# EAGLE board interactiveBoard (EAGLE 9.6.2)
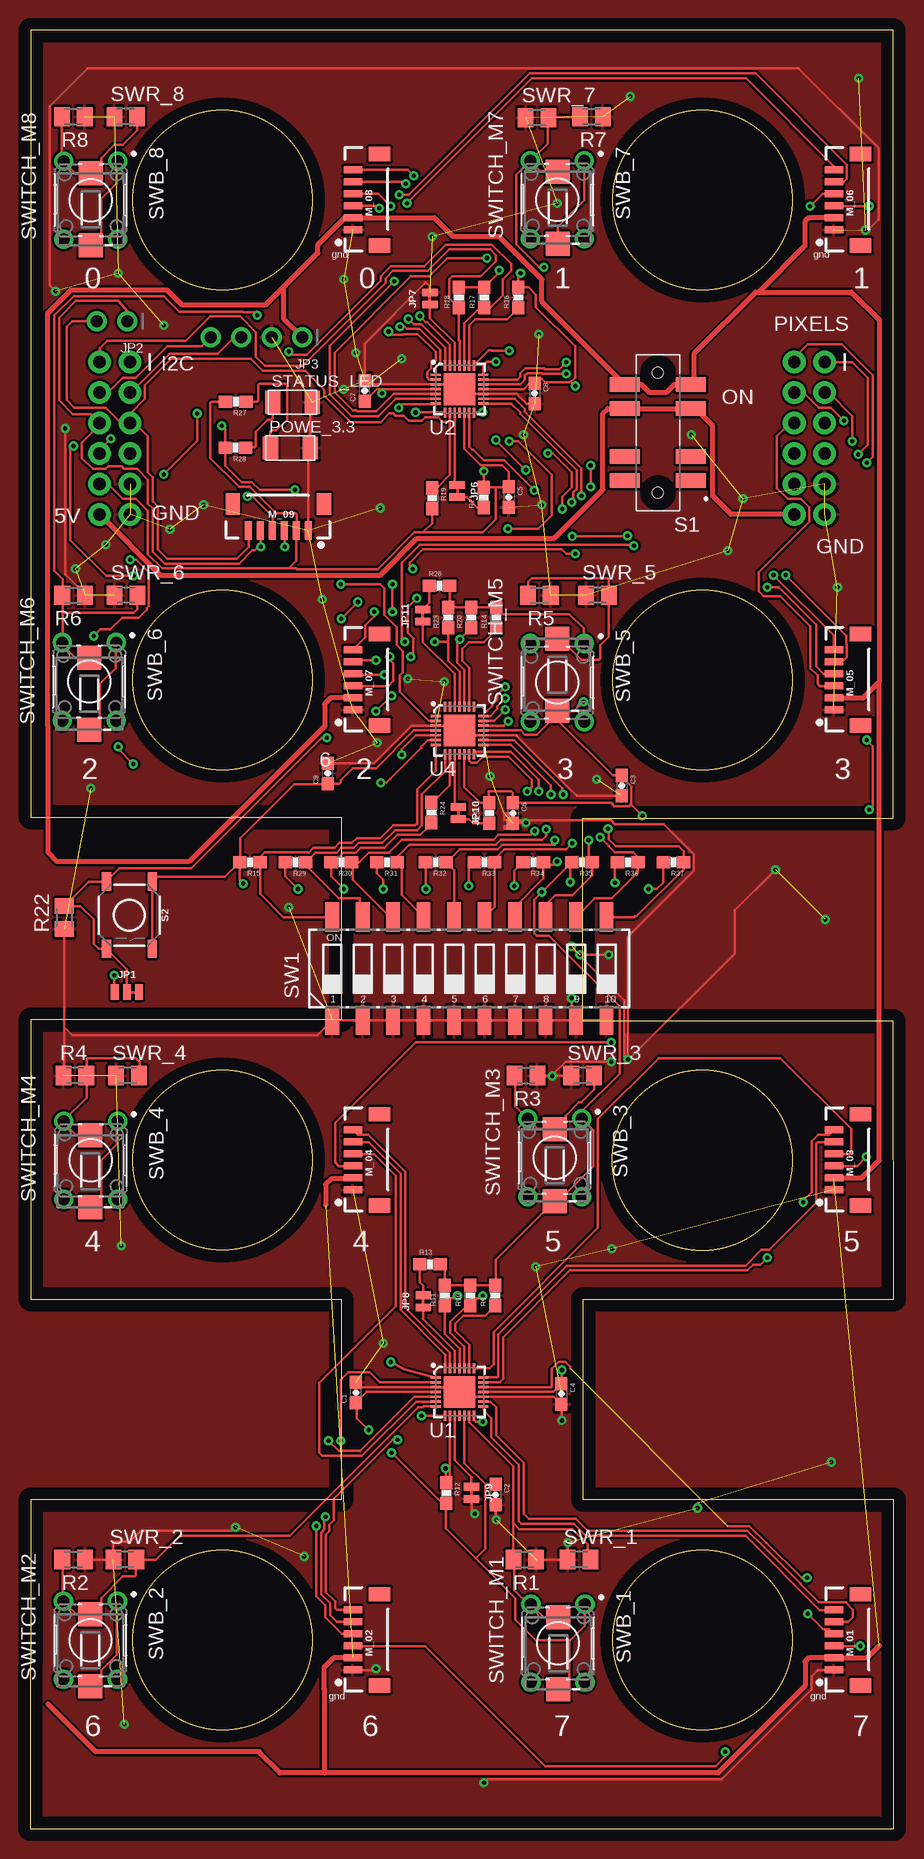
[diagram p0: board, top side]
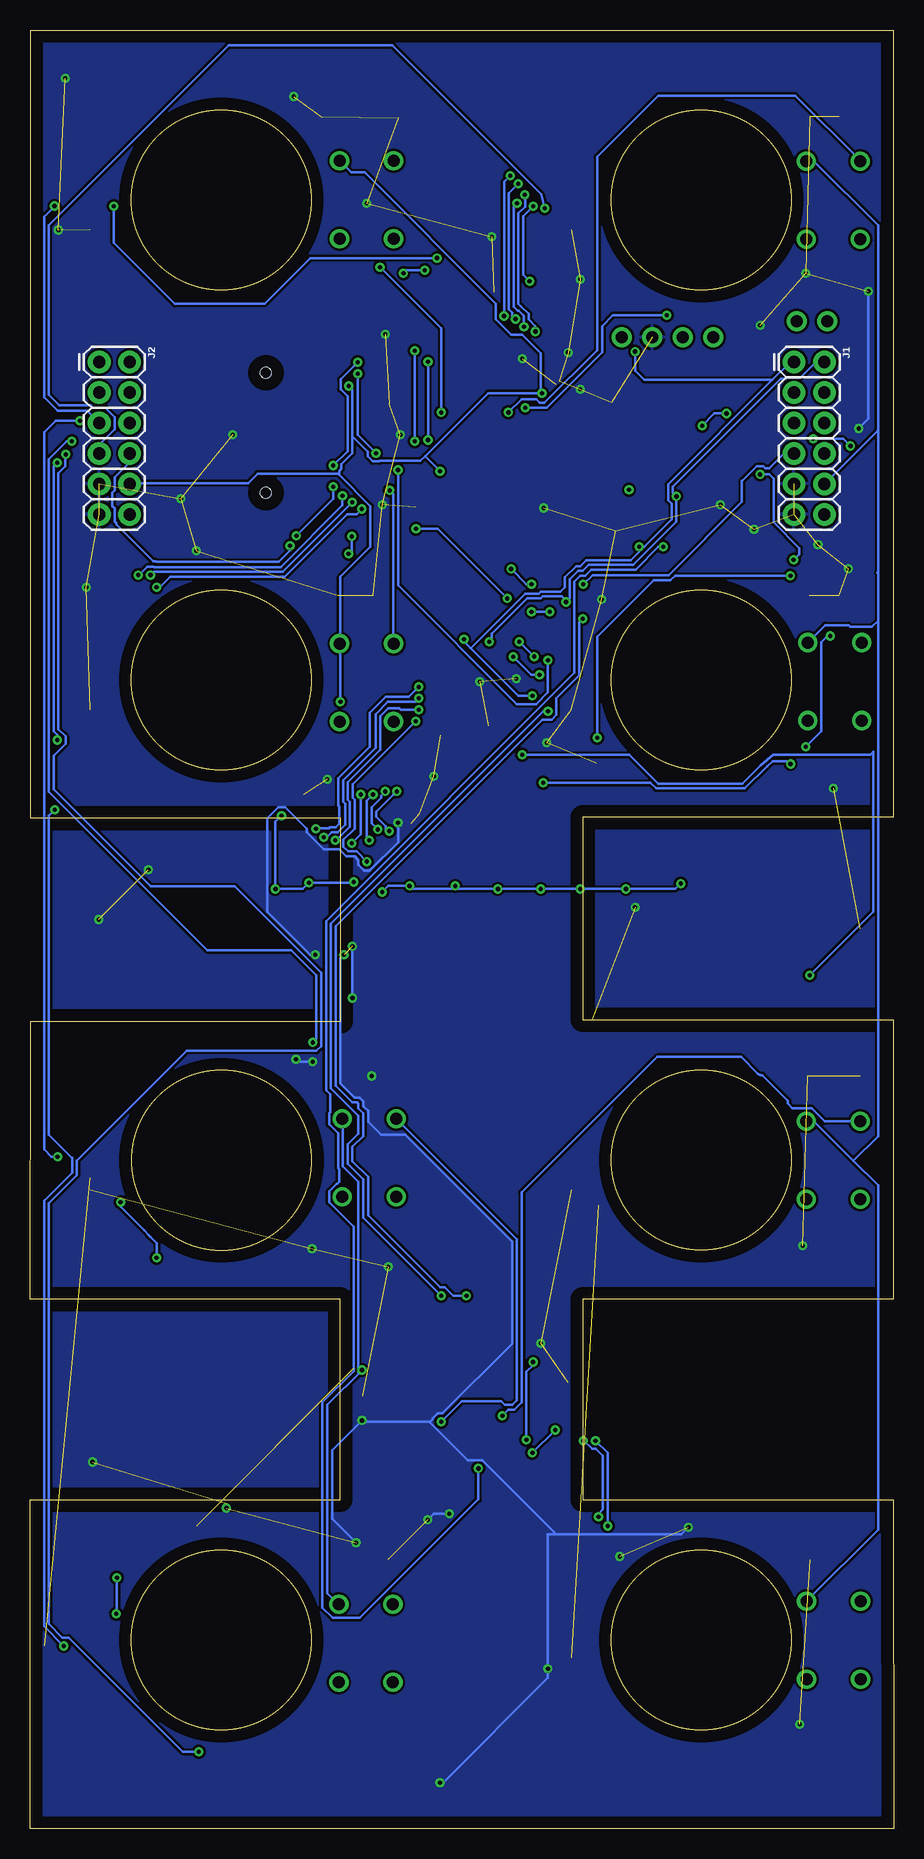
[diagram p1: board, bottom side, seen from below]

Size 71.99 x 149.9 mm. Coordinates in mm from the lower left corner, seen from the top.
Outline: 0.05,67.41 25.92,67.41 25.92,84.31 0.05,84.31 0.05,149.9 71.95,149.9 71.95,84.2 46.08,84.2 46.08,67.27 71.95,67.28 71.99,44.11 46.12,44.11 46.12,27.42 71.99,27.42 71.99,0 0,0 0.05,27.42 25.92,27.42 25.92,44.11 0.05,44.11 0.05,67.41
Outline: 0.05,67.41 0.05,67.41
Outline: circle at 16.06,15.72 radius 7.49
Outline: circle at 16.06,55.72 radius 7.49
Outline: circle at 16.06,135.72 radius 7.49
Outline: circle at 56.06,95.72 radius 7.49
Outline: circle at 56.06,135.72 radius 7.49
Outline: circle at 56.03,55.71 radius 7.49
Outline: circle at 16.06,95.72 radius 7.49
Outline: circle at 56.06,15.72 radius 7.49
Copper layers (1*16): Top 0.035mm / dielectric 1.5mm / Bottom 0.035mm
Design rules "default": minimum track width 6mil, minimum drill 0.35mm, track to track 6mil, track to pad 6mil, pad to pad 6mil, via to via 6mil, smd to smd 6mil, copper to edge 40mil, drill to drill 6mil, minimum pad ring 10mil, minimum via ring 8mil, stop-mask expansion 4mil, vias tented up to drill 0mil, thermal gap 10mil
Net classes: 0 default: width 0.2 mm, clearance 0.2 mm; 1 gnd: width 0.2 mm, clearance 0.2 mm to class 0, clearance 0.2 mm; 2 3v: width 0.2 mm, clearance 0.2 mm; 4 5v: width 0.4 mm, clearance 0.2 mm to class 0, clearance 0.2 mm

## Footprints (pad centres in the part's own frame; a part is rotated, then mirrored left to right if it is on the bottom)
0603-CAP = smd 1.1 x 1: 1 -0.85,0; 2 0.85,0
2X6 = drill 1.016 pad 1.88: 1 0,0; 2 0,2.54; 3 2.54,0; 4 2.54,2.54; 5 5.08,0; 6 5.08,2.54; 7 7.62,0; 8 7.62,2.54; 9 10.16,0; 10 10.16,2.54; 11 12.7,0; 12 12.7,2.54
SMT-JUMPER_3_1-NC_TRACE_NO-SILK = smd 0.635 x 1.27: 1 -1.016,0; 2 0,0; 3 1.016,0
1X02_ROUND = drill 1 pad 1.676: 1 -1.27,0; 2 1.27,0
1X04_ROUND = drill 1 pad 1.676: 1 -3.81,0; 2 -1.27,0; 3 1.27,0; 4 3.81,0
SMT-JUMPER_2_NC_TRACE_NO-SILK = smd 0.635 x 1.27: 1 -0.508,0; 2 0.508,0
1X06-1MM = smd 0.6 x 1.55: 1 -2.54,1.27; 2 -1.54,1.27; 3 -0.54,1.27; 4 0.46,1.27; 5 1.46,1.27; 6 2.46,1.27 | smd 1.2 x 1.8: P$1 -3.84,-0.955; P$2 3.76,-0.955
LED1206FAB = smd 1.27 x 1.905: 1 -1.651,0; 2 1.651,0
M0805 = smd 1.3 x 1.6: 1 -0.95,0; 2 0.95,0
0603-RES = smd 1.1 x 1: 1 -0.85,0; 2 0.85,0
SW_JS207011SCQNR = smd 2.5 x 1.2: 1 -2.75,4; 2 -2.75,2; 3 -2.75,-2; 4 -2.75,-4; 5 2.75,4; 6 2.75,2; 7 2.75,-2; 8 2.75,-4 | hole 0.9: 0,5; 0,-5
TACTILE_SWITCH_SMD_5.2MM = smd 1.524 x 0.762: 1 -2.794,1.905; 2 2.794,1.905; 3 -2.794,-1.905; 4 2.794,-1.905
CTS-219-10 = smd 1.13 x 2.44: 1 -11.43,-4.3; 2 -8.89,-4.3; 3 -6.35,-4.3; 4 -3.81,-4.3; 5 -1.27,-4.3; 6 1.27,-4.3; 7 3.81,-4.3; 8 6.35,-4.3; 9 8.89,-4.3; 10 11.43,-4.3; 11 11.43,4.3; 12 8.89,4.3; 13 6.35,4.3; 14 3.81,4.3; 15 1.27,4.3; 16 -1.27,4.3; 17 -3.81,4.3; 18 -6.35,4.3; 19 -8.89,4.3; 20 -11.43,4.3
B3F-1000 = drill 1 pad 1.6: 1 -3.25,2.25; 2 3.25,2.25; 3 -3.25,-2.25; 4 3.25,-2.25
DTSM-3 = smd 2 x 2: 1 -3,0; 2 3,0
QFN-28 = smd 0.85 x 0.2: 1 -1.975,1.2; 2 -1.975,0.8; 3 -1.975,0.4; 4 -1.975,0; 5 -1.975,-0.4; 6 -1.975,-0.8; 7 -1.975,-1.2; 15 1.975,-1.2; 16 1.975,-0.8; 17 1.975,-0.4; 18 1.975,0; 19 1.975,0.4; 20 1.975,0.8; 21 1.975,1.2 | smd 0.2 x 0.85: 8 -1.2,-1.975; 9 -0.8,-1.975; 10 -0.4,-1.975; 11 0,-1.975; 12 0.4,-1.975; 13 0.8,-1.975; 14 1.2,-1.975; 22 1.2,1.975; 23 0.8,1.975; 24 0.4,1.975; 25 0,1.975; 26 -0.4,1.975; 27 -0.8,1.975; 28 -1.2,1.975 | smd 2.65 x 2.65: 29 0,0

## Placement (x,y rotation side)
C1  0.1uF  [0603-CAP]  27.16,36.35 90 top
C2  0.1uF  [0603-CAP]  38.79,27.85 270 top
C3  0.1uF  [0603-CAP]  49.31,86.92 270 top
C4  0.1uF  [0603-CAP]  44.29,36.23 270 top
C5  0.1uF  [0603-CAP]  39.9,110.97 270 top
C6  0.1uF  [0603-CAP]  40.24,84.64 270 top
C7  0.1uF  [0603-CAP]  27.9,119.82 90 top
C8  0.1uF  [0603-CAP]  42.05,119.61 270 top
C9  0.1uF  [0603-CAP]  24.82,87.94 90 top
J1  2X6 FEMALE  [2X6]  8.34,122.23 270 bottom
J2  2X6 FEMALE  [2X6]  66.23,122.23 270 bottom
JP1  JUMPER-SMT_3_1-NC_TRACE_NO-SILK  [SMT-JUMPER_3_1-NC_TRACE_NO-SILK]  8.08,69.73 0 top
JP2  [1X02_ROUND]  6.84,125.63 180 top
JP3  [1X04_ROUND]  18.88,124.29 180 top
JP6  JUMPER-SMT_2_NC_TRACE_NO-SILK  [SMT-JUMPER_2_NC_TRACE_NO-SILK]  35.59,111.49 270 top
JP7  JUMPER-SMT_2_NC_TRACE_NO-SILK  [SMT-JUMPER_2_NC_TRACE_NO-SILK]  33.33,127.51 90 top
JP8  JUMPER-SMT_2_NC_TRACE_NO-SILK  [SMT-JUMPER_2_NC_TRACE_NO-SILK]  32.77,43.95 90 top
JP9  JUMPER-SMT_2_NC_TRACE_NO-SILK  [SMT-JUMPER_2_NC_TRACE_NO-SILK]  36.78,28 270 top
JP10  JUMPER-SMT_2_NC_TRACE_NO-SILK  [SMT-JUMPER_2_NC_TRACE_NO-SILK]  35.69,84.64 270 top
JP11  JUMPER-SMT_2_NC_TRACE_NO-SILK  [SMT-JUMPER_2_NC_TRACE_NO-SILK]  32.72,101.1 90 top
M_01  [1X06-1MM]  68.25,15.78 90 top
M_02  [1X06-1MM]  28.17,15.78 90 top
M_03  [1X06-1MM]  68.25,55.78 90 top
M_04  [1X06-1MM]  28.17,55.78 90 top
M_05  [1X06-1MM]  68.25,95.79 90 top
M_06  [1X06-1MM]  68.25,135.79 90 top
M_07  [1X06-1MM]  28.17,95.79 90 top
M_08  [1X06-1MM]  28.17,135.79 90 top
M_09  [1X06-1MM]  20.66,109.45 180 top
POWE_3.3  LEDFAB1206  [LED1206FAB]  21.7,115.07 0 top
R1  10k  [M0805]  41.23,22.43 180 top
R2  10k  [M0805]  3.64,22.43 180 top
R3  10k  [M0805]  41.33,62.77 180 top
R4  10K  [M0805]  3.74,62.77 0 top
R5  10k  [M0805]  42.45,102.8 180 top
R6  10k  [M0805]  3.64,102.8 180 top
R7  10k  [M0805]  46.79,142.68 180 top
R8  10k  [M0805]  3.61,142.68 180 top
R9  10K  [0603-RES]  38.78,44.44 90 top
R10  10K  [0603-RES]  36.68,44.44 90 top
R11  10K  [0603-RES]  34.58,44.44 90 top
R12  10K  [0603-RES]  34.67,27.97 270 top
R13  10K  [0603-RES]  33.33,47.05 0 top
R14  10K  [0603-RES]  38.84,100.94 90 top
R15  10K  [0603-RES]  18.32,80.55 180 top
R16  10K  [0603-RES]  40.71,127.6 90 top
R17  10K  [0603-RES]  37.84,127.6 90 top
R18  10K  [0603-RES]  35.75,127.6 90 top
R19  10K  [0603-RES]  33.53,110.88 270 top
R20  10K  [0603-RES]  36.78,100.94 90 top
R21  10K  [0603-RES]  37.8,110.95 90 top
R22  10K  [M0805]  2.86,75.93 90 top
R23  10K  [0603-RES]  34.85,100.94 90 top
R24  10K  [0603-RES]  33.46,84.69 270 top
R25  10K  [0603-RES]  38.26,84.64 90 top
R26  10K  [0603-RES]  34.12,103.59 0 top
R27  500  [0603-RES]  17.15,118.93 180 top
R28  500  [0603-RES]  17.12,115.09 180 top
R29  10K  [0603-RES]  22.13,80.55 180 top
R30  10K  [0603-RES]  25.94,80.55 180 top
R31  10K  [0603-RES]  29.75,80.55 180 top
R32  10K  [0603-RES]  33.81,80.55 180 top
R33  10K  [0603-RES]  37.88,80.55 180 top
R34  10K  [0603-RES]  41.94,80.55 180 top
R35  10K  [0603-RES]  46,80.55 180 top
R36  10K  [0603-RES]  49.81,80.55 180 top
R37  10K  [0603-RES]  53.62,80.55 180 top
S1  JS207011SCQNR  [SW_JS207011SCQNR]  52.33,116.34 180 top
S2  [TACTILE_SWITCH_SMD_5.2MM]  8.28,76.13 270 top
STATUS_LED  LEDFAB1206  [LED1206FAB]  21.87,118.88 0 top
SW1  219-10  [CTS-219-10]  36.62,71.68 0 top
SWB_1  B3F-1000  [B3F-1000]  44,15.45 270 top
SWB_2  B3F-1000  [B3F-1000]  5.03,15.7 270 top
SWB_3  B3F-1000  [B3F-1000]  43.72,55.91 270 top
SWB_4  B3F-1000  [B3F-1000]  5.06,55.71 270 top
SWB_5  B3F-1000  [B3F-1000]  43.95,95.52 270 top
SWB_6  B3F-1000  [B3F-1000]  4.93,95.6 270 top
SWB_7  B3F-1000  [B3F-1000]  43.95,135.74 270 top
SWB_8  B3F-1000  [B3F-1000]  5.06,135.72 270 top
SWITCH_M1  DTSM-3  [DTSM-3]  44.02,14.64 90 top
SWITCH_M2  DTSM-3  [DTSM-3]  5.03,14.89 90 top
SWITCH_M3  DTSM-3  [DTSM-3]  43.72,55.29 90 top
SWITCH_M4  DTSM-3  [DTSM-3]  5.02,54.78 90 top
SWITCH_M5  DTSM-3  [DTSM-3]  43.95,96.15 90 top
SWITCH_M6  DTSM-3  [DTSM-3]  4.93,94.57 90 top
SWITCH_M7  DTSM-3  [DTSM-3]  43.97,135.07 90 top
SWITCH_M8  DTSM-3  [DTSM-3]  5.06,134.96 90 top
SWR_1  10K  [M0805]  45.75,22.43 0 top
SWR_2  10K  [M0805]  7.9,22.43 0 top
SWR_3  10K  [M0805]  46.06,62.77 0 top
SWR_4  10K  [M0805]  8.13,62.77 0 top
SWR_5  10K  [M0805]  47.3,102.8 0 top
SWR_6  10K  [M0805]  8.01,102.8 0 top
SWR_7  10K  [M0805]  42.25,142.58 0 top
SWR_8  10K  [M0805]  7.98,142.68 0 top
U1  SX1509  [QFN-28]  35.79,36.4 0 top
U2  SX1509  [QFN-28]  35.79,119.97 0 top
U4  SX1509  [QFN-28]  35.79,91.52 0 top

## Library data of the parts
C1-C9 = SparkFun-Capacitors; PROD_ID: CAP-00810
J1 J2 = SparkFun-Connectors; PROD_ID: CONN-12423
JP1 JP6-JP11 = SparkFun-Jumpers
JP2 JP3 = microbuilder
M_01-M_09 = SparkFun-Connectors; PROD_ID: CONN-08249; SF_ID: GPS-00579
POWE_3.3 STATUS_LED = fab
R1-R8 R22 SWR_1-SWR_8 = resistor
R9-R21 R23-R37 = SparkFun-Resistors; PROD_ID: RES-00824
S1 = JS207011SCQNR; AVAILABILITY: Unavailable; DESCRIPTION: Slide Switch DP3T Surface Mount; MF: C&K; MP: JS207011SCQNR; PACKAGE: None; PRICE: None
S2 = SparkFun-Switches; PROD_ID: SWCH-08247; SF_SKU: COM-08720
SW1 = switch-dil; MF: SLI (CML/IDI); MPN: 219-10PK; OC_FARNELL: unknown; OC_NEWARK: 19M0224
SWB_1-SWB_8 = Switch; CREATED_BY: PCBLayout.com; DIGI_KEY_PART_NUMBER: SW400-ND; MANUFACTURER: Omron Electronics Inc-EMC Div; MPN: B3F-1000; PACKAGE: SPST-NO
SWITCH_M1-SWITCH_M8 = switch-tact
U1 U2 U4 = SparkFun-DigitalIC; PROD_ID: IC-11311

## Nets
0_SX1: M_04.6 U1.27
0_SX2: M_08.6 U2.27
0_SX3: U4.27
1_SX1: M_04.5 U1.28
1_SX2: M_08.5 U2.28
1_SX3: U4.28
2_SX1: M_02.6 U1.1
2_SX2: M_06.6 U2.1
2_SX3: U4.1
3.3V [3v]: C1.1 C2.1 C3.1 C4.1 C5.1 C6.1 C7.1 C8.1 C9.1 J1.10 J2.10 M_09.2 R9.2 R10.2 R11.2 R12.2 R13.2 R14.2 R15.2 R16.2 R17.2 R18.2 R19.2 R20.2 R21.2 R23.2 R24.2 R25.2 R26.2 R27.2 R29.2 R30.2 R31.2 R32.2 R33.2 R34.2 R35.2 R36.2 R37.2 S2.1 S2.2 SWB_1.1 SWB_2.1 SWB_3.1 SWB_4.1 SWB_5.1 SWB_6.1 SWB_7.1 SWB_8.1 SWITCH_M1.1 SWITCH_M2.1 SWITCH_M3.1 SWITCH_M4.1 SWITCH_M5.1 SWITCH_M6.1 SWITCH_M7.1 SWITCH_M8.1 U1.4 U1.12 U1.18 U2.4 U2.12 U2.18 U4.4 U4.12 U4.18
3_SX1: M_02.5 U1.2
3_SX2: M_06.5 U2.2
3_SX3: J1.7 U4.2
4_SX1: M_02.4 U1.5
4_SX2: M_06.4 U2.5
4_SX3: JP1.1 U4.5
5_SX1: M_04.4 U1.6
5_SX2: M_08.4 U2.6
5_SX3: R28.2 U4.6
6_SX1: R2.2 SWB_2.3 SWITCH_M2.2 SWR_2.2 U1.7
6_SX2: R6.2 SWB_6.3 SWITCH_M6.2 SWR_6.2 U2.7
6_SX3: R15.1 SW1.20 U4.7
7_SX1: R4.2 SWB_4.3 SWITCH_M4.2 SWR_4.2 U1.8
7_SX2: R8.2 SWB_8.3 SWITCH_M8.2 SWR_8.2 U2.8
7_SX3: R29.1 SW1.19 U4.8
8_SX1: R1.2 SWB_1.3 SWITCH_M1.2 SWR_1.2 U1.13
8_SX2: R5.2 SWB_5.3 SWITCH_M5.2 SWR_5.2 U2.13
8_SX3: R30.1 SW1.18 U4.13
9_SX1: R3.2 SWB_3.3 SWITCH_M3.2 SWR_3.2 U1.14
9_SX2: R7.2 SWB_7.3 SWITCH_M7.2 SWR_7.2 U2.14
9_SX3: R31.1 SW1.17 U4.14
10_SX1: M_01.6 U1.15
10_SX2: M_05.6 U2.15
10_SX3: R32.1 SW1.16 U4.15
11_SX1: M_01.5 U1.16
11_SX2: M_05.5 U2.16
11_SX3: R33.1 SW1.15 U4.16
12_SX1: M_01.4 U1.19
12_SX2: M_05.4 U2.19
12_SX3: R34.1 SW1.14 U4.19
13_SX1: M_03.6 U1.20
13_SX2: M_07.6 U2.20
13_SX3: R35.1 SW1.13 U4.20
14_SX1: M_03.5 U1.21
14_SX2: M_07.5 U2.21
14_SX3: R36.1 SW1.12 U4.21
15_SX1: M_03.4 U1.22
15_SX2: M_07.4 U2.22
15_SX3: R37.1 SW1.11 U4.22
!INT_SX3: R24.1 U4.9
!RESET_SX1: R9.1 U1.23
!RESET_SX2: R16.1 U2.23
!RESET_SX3: R14.1 U4.23
ADDR0_SX1: JP8.1 U1.26
ADDR0_SX2: JP7.1 U2.26
ADDR0_SX3: JP11.1 U4.26
ADDR1_SX1: JP9.1 U1.10
ADDR1_SX2: JP6.1 U2.10
ADDR1_SX3: JP10.1 U4.10
CAN_RX2: J1.4 JP3.4
CAN_TX2: J1.3 JP3.3
GND_MCU: C1.2 C2.2 C3.2 C4.2 C5.2 C6.2 C7.2 C8.2 C9.2 J1.9 J1.11 J2.9 J2.11 JP3.2 JP7.2 JP9.2 M_01.1 M_02.1 M_03.1 M_04.1 M_05.1 M_06.1 M_07.1 M_08.1 M_09.1 POWE_3.3.2 R1.1 R2.1 R3.1 R4.1 R5.1 R6.1 R7.1 R8.1 R22.1 STATUS_LED.2 SW1.1 SW1.2 SW1.3 SW1.4 SW1.5 SW1.6 SW1.7 SW1.8 SW1.9 SW1.10 SWR_1.1 SWR_2.1 SWR_3.1 SWR_4.1 SWR_5.1 SWR_6.1 SWR_7.1 SWR_8.1 U1.3 U1.17 U1.29 U2.3 U2.17 U2.29 U4.3 U4.17 U4.29
INT_01: J1.6 JP2.1 M_09.5 R12.1 U1.9
INT_02: J1.5 JP2.2 M_09.6 R19.1 U2.9
N$5: JP6.2 R21.1
N$8: JP8.2 R13.1
N$13: R28.1 STATUS_LED.1
N$14: JP10.2 R25.1
N$15: JP11.2 R26.1
N$193: POWE_3.3.1 R27.1
NEOPIXEL_01: J2.2 M_01.3
NEOPIXEL_02: J2.1 M_02.3
NEOPIXEL_03: J2.4 M_03.3
NEOPIXEL_04: J2.3 M_04.3
NEOPIXEL_05: J2.6 M_05.3
NEOPIXEL_06: J2.5 M_06.3
NEOPIXEL_07: J2.8 M_07.3
NEOPIXEL_08: J2.7 M_08.3
OSCIO_SX1: U1.11
OSCIO_SX2: U2.11
OSCIO_SX3: U4.11
RESET: J1.8 JP1.2 JP1.3 R22.2 S2.3 S2.4
SCL_00: J1.2 M_09.4 R11.1 R18.1 R23.1 U1.25 U2.25 U4.25
SDA_00: J1.1 M_09.3 R10.1 R17.1 R20.1 U1.24 U2.24 U4.24
VCC_5V [5v]: JP3.1 M_01.2 M_02.2 M_03.2 M_04.2 M_05.2 M_06.2 M_07.2 M_08.2 S1.4 S1.8
VCC_5V_IN [5v]: J1.12 J2.12 S1.3 S1.7

## Tracks (layer width: path | path; a pad name or v marks a point on that pad's centre or on a via)
0_SX1
  Top 0.2: U1.27 34.99,39.69 31.28,43.4 31.28,54.74 28.17,57.84 27.3,57.84 M_04.6
0_SX2  (via drill 0.35)
  Top 0.2: U2.27 34.99,123.66 33.09,125.56 33,125.56 v32.49,126.07 | v31.98,137.75 31.48,138.26 M_08.6
  Bottom 0.2: v32.49,126.07 32.49,137.24 v31.98,137.75
1_SX1
  Top 0.2: M_04.5 26.93,57.23 28.23,57.23 30.88,54.57 30.88,43.23 34.59,39.52 U1.28
1_SX2  (via drill 0.35)
  Top 0.2: M_08.5 31.13,137.25 v31.31,137.07 | v31.54,125.81 31.96,125.39 32.6,125.39 34.59,123.4 U2.28
  Bottom 0.2: v31.31,137.07 32.09,136.29 32.09,126.62 31.81,126.35 31.81,126.09 v31.54,125.81
2_SX1  (via drill 0.35)
  Top 0.2: v30.07,38.9 31.18,38.28 U1.1 | v30.63,32.43 30.23,32.43 25.3,27.5 25.3,25.71 24.93,25.35 24.93,24.78 24.67,24.51 24.67,19.71 25.42,18.95 25.42,18.37 25.55,18.24 M_02.6
  Bottom 0.2: v30.07,38.9 30.07,38.64 30.63,38.09 v30.63,32.43
2_SX2  (via drill 0.35)
  Top 0.2: U2.1 33.82,121.8 34.19,122.18 34.19,123.23 32.44,124.99 31.4,124.99 31.22,125.17 v30.83,125.17 | v31.41,135.46 41.83,145.88 59.67,145.88 66.98,138.56 M_06.6
  Bottom 0.2: v30.83,125.17 30.83,126.06 31.25,126.49 31.35,126.49 31.69,126.83 31.69,135.19 v31.41,135.46
3.3V  (via drill 0.35)
  Top 0.2: U4.4 31.98,91.52 28.85,88.39 26.9,88.39 25.89,87.37 25.89,87.2 25.77,87.09 C9.1 24.73,87.03 22.03,87.03 17.53,82.53 17.53,80.63 R15.2 | 38.83,111.8 R21.2 37.83,111.83 v37.83,113.13 | 38.83,111.8 39.88,111.8 C5.1 39.9,113.06 39.35,113.62 37.57,113.62 36.19,115 U2.12 | U1.12 36.19,30.47 37.97,28.7 | 37.97,28.7 C2.1 | U1.18 43.61,36.4 C4.1 44.33,37.13 v44.33,38.23 | U1.4 28.07,36.4 C1.1 27.23,35.43 27.23,34.23 v28.23,33.23 | R13.2 34.58,46.65 R11.2 R10.2 R9.2 38.83,45.33 38.83,47.43 42.83,51.43 42.83,52.23 42.93,52.33 43.63,52.33 SWITCH_M3.1 43.73,52.33 44.53,52.33 44.63,52.43 44.63,52.93 46.93,55.23 46.93,58.23 46.03,59.13 SWB_3.1 46.03,59.33 46.03,59.83 49.13,62.93 49.13,68.53 43.23,74.43 42.23,74.43 42.03,74.63 42.03,77.43 42.63,78.03 v42.65,78.06 v42.67,78.06 45.01,80.41 | R18.2 R17.2 39.1,129.7 v39.1,129.88 | S2.2 S2.1 10.58,79.33 16.25,79.33 R15.2 | R26.2 34.97,101.91 R23.2 R20.2 R14.2 38.83,101.73 38.83,101.23 44.93,101.23 46.13,100.03 46.13,98.83 SWB_5.1 | R19.2 33.53,108.81 32.75,108.02 | 32.75,108.02 32.03,108.02 28.98,104.98 22.25,104.98 22.2,105.03 21.57,105.03 | SWITCH_M7.1 43.97,133.48 46.2,135.71 SWB_7.1 | U2.4 29.33,119.97 | 29.33,119.97 28.9,119.97 | C3.1 48.54,87.77 43.95,92.37 SWITCH_M5.1 44.03,93.13 44.18,93.13 | SWITCH_M2.1 5.13,11.93 5.83,11.93 5.93,12.03 5.93,13.19 7.23,14.49 7.23,18.93 SWB_2.1 | SWITCH_M4.1 5.03,51.83 5.83,51.83 5.93,51.93 5.93,55.73 7.23,57.03 7.23,58.93 SWB_4.1 | SWITCH_M6.1 5.03,91.53 5.73,91.53 5.83,91.63 5.83,95.43 7.13,96.73 7.13,98.83 SWB_6.1 | SWITCH_M8.1 5.13,131.93 5.83,131.93 5.93,132.03 5.93,135.83 7.23,137.13 7.23,138.93 SWB_8.1
  Top 0.2: R27.2 16.23,118.93 15.13,118.93 15.03,118.83 15.03,114.23 17.43,111.83 18.33,111.83 20.53,109.63 22.13,109.63 22.23,109.53 22.23,108.23 M_09.2 22.2,105.65 21.57,105.03 | 21.57,105.03 11.03,105.03 9.83,106.23 9.83,109.83 8.83,110.83 7.73,110.83 6.53,112.03 5.83,112.03 J1.10 | 38.83,111.8 38.83,109.13 37.73,108.03 32.83,108.03 32.75,108.02 | 37.97,28.7 37.93,28.63 37.93,23.33 37.13,22.53 | 44.98,15.68 46.23,16.93 46.23,18.63 SWB_1.1 | 44.98,15.68 44.93,15.63 44.93,11.73 44.83,11.63 SWITCH_M1.1 | 37.13,22.53 40.43,19.23 40.43,17.43 42.13,15.73 44.93,15.73 44.98,15.68 | v29.33,119.63 29.33,119.97 | C3.1 49.33,87.73 49.33,87.63 | 45.08,120.58 45.03,120.53 42.93,120.53 42.63,120.83 42.03,120.83 42.03,120.53 | 45.08,120.58 45.43,120.93 45.43,123.53 42.15,126.8 42.15,127.84 41.55,128.45 R16.2 40.71,129.45 v40.87,129.62 | 42.03,120.53 C8.1 | v45.43,120.23 45.08,120.58 | 44.18,93.13 45.33,93.13 v46.13,93.93 | 37.13,22.53 34.63,25.03 34.63,27.03 R12.2 34.53,27.03 34.43,27.03 v30.13,31.33 | U4.12 36.19,86.8 37.51,85.49 R25.2 38.23,85.53 38.23,86.44 40.11,86.44 40.24,86.31 C6.1 48.42,85.49 48.68,85.22 49.93,85.22 50.07,85.37 | 50.07,85.37 50.11,85.4 50.11,86.75 50.13,86.83 49.33,87.63 | 49.33,87.53 49.33,87.63 | R33.2 36.56,80.08 v36.56,78.57 | v33,78.31 32.96,78.35 R32.2 | v29.44,78.31 29.44,79.08 28.9,79.62 R31.2 | v26.14,78.31 25.09,79.37 R30.2 25.13,80.63 25.39,80.63 26.11,81.35 27.14,81.35 27.54,81.75 29.52,81.75 30.59,82.82 32.43,82.82 32.53,82.83 33.13,83.43 33.13,83.53 33.43,83.83 R24.2 | v22.33,78.31 21.28,79.37 R29.2 | v17.76,78.77 17.47,79.06 R15.2
  Top 0.2: R34.2 40.37,79.82 v40.37,78.57 | 45.01,80.41 R35.2 | R37.2 52.77,78.84 52.25,78.31 v51.54,78.31 | v48.75,78.82 48.75,80.33 R36.2 | v45.01,78.9 45.01,80.41 | v51.03,84.41 50.07,85.37 | 42.03,120.53 41.69,120.53 41.13,119.97 U2.18 | 44.18,93.13 42.21,91.17 41.24,91.17 40.89,91.52 U4.18 | 49.33,87.63 C3.1
  Top 0.203: 28.9,119.97 C7.1
  Bottom 0.2: 3.38,55.68 6.63,58.93 7.23,58.93 SWB_4.1 | 3.38,55.68 1.33,53.63 1.33,24.93 7.23,19.03 SWB_2.1 | 1.38,116.48 5.73,112.13 J1.10 | 1.38,116.48 1.33,116.53 1.33,133.63 6.63,138.93 7.23,138.93 SWB_8.1 | 7.13,98.93 SWB_6.1 5.73,100.31 3.77,100.31 3.63,100.16 1.83,100.16 1.33,100.67 | 1.38,116.48 1.33,116.43 1.33,104.73 1.38,104.68 1.33,104.63 1.33,100.67 | 3.38,55.68 1.33,57.73 1.33,100.67 | v44.33,38.23 47.23,35.33 47.23,19.63 46.33,18.73 SWB_1.1 | 44.33,38.13 v44.33,38.23 | SWB_3.1 45.93,59.13 45.93,55.23 44.63,53.93 44.63,38.03 v44.33,38.23 | SWB_7.1 46.13,138.93 45.23,138.03 44.12,138.03 33.17,127.08 33.17,125.78 31.87,124.49 30.97,124.49 29.44,122.96 29.44,119.75 v29.33,119.63 33.83,119.63 39.08,114.38 | 46.23,112.83 43.63,110.23 43.63,106.83 46.13,104.33 46.13,98.83 SWB_5.1 46.13,98.73 v46.13,93.93 | 46.23,112.83 46.33,112.93 53.03,112.93 53.83,112.13 63.63,112.13 J2.10 | v45.43,120.23 45.13,119.93 45.13,116.04 | 39.08,114.38 39.46,113.99 42.85,113.99 42.88,113.96 43.44,113.96 43.84,114.35 43.84,114.75 45.13,116.04 | 39.08,114.38 v37.83,113.13 | v17.76,78.77 18.21,78.31 v22.33,78.31 v26.14,78.31 v29.44,78.31 v33,78.31 36.3,78.31 v36.56,78.57 36.81,78.31 40.11,78.31 v40.37,78.57 42.14,78.57 v42.65,78.06 | v45.01,78.9 45.09,78.82 v48.75,78.82 49.26,78.31 v51.54,78.31 51.54,83.9 v51.03,84.41 | v39.1,129.88 40.62,129.88 v40.87,129.62 | v30.13,31.33 v28.23,33.23 | 45.13,116.04 45.13,114.63 46.04,113.72 46.04,113.32 46.23,113.13 46.23,112.83
3_SX1  (via drill 0.35)
  Top 0.2: v25.89,32.34 25.89,37.4 26.54,38.05 28.31,38.05 29.15,37.2 U1.2 | M_02.5 25.55,17.24 25.02,17.77 25.02,18.79 24.27,19.54 24.27,24.68 24.53,24.95 24.53,25.91 v24.62,25.99
  Bottom 0.2: v24.62,25.99 24.62,26.24 24.26,26.61 24.26,31.07 24.85,31.66 25.15,31.66 25.83,32.34 v25.89,32.34
3_SX2  (via drill 0.35)
  Top 0.2: U2.2 33.27,120.77 33.09,120.95 33.09,121.39 33.42,121.72 33.42,121.97 33.79,122.35 33.79,123.07 32.32,124.54 31.16,124.54 31.11,124.49 30.16,124.49 v29.87,124.77 | v30.77,136.17 31.55,136.17 41.66,146.28 60.46,146.28 68.06,138.68 68.06,137.5 67.81,137.25 M_06.5
  Bottom 0.2: v29.87,124.77 29.87,125.22 30.43,125.78 30.43,126.23 31.09,126.89 31.1,126.89 31.29,127.08 31.29,134.63 30.74,135.18 30.74,135.74 30.77,135.78 v30.77,136.17
3_SX3  (via drill 0.35)
  Top 0.2: U4.2 33.22,92.32 30.8,94.74 30.8,96.12 31.06,96.38 31.06,98.14 30.55,98.65 30.55,100.13 29.53,101.15 29.53,103.38 29.21,103.7 v25.89,103.7
  Bottom 0.2: v25.89,103.7 25.11,104.48 18.78,104.48 12.68,110.57 12.68,112.35 12.62,112.35 11.44,113.54 10.87,113.54 10.7,113.37 10.39,113.37 9.15,114.61 J1.7
4_SX1  (via drill 0.35)
  Top 0.2: 27.51,31.48 32.03,36 U1.5 | 27.51,31.48 27.5,31.47 | 27.51,31.48 25.73,31.48 v24.87,32.34 | M_02.4 25.99,16.24 24.62,17.61 24.62,18.62 23.86,19.39 v23.86,25.23
  Bottom 0.2: v23.86,25.23 23.86,31.32 v24.87,32.34
4_SX2  (via drill 0.35)
  Top 0.2: U2.5 30.31,119.57 28.86,118.12 27.27,118.12 27.2,118.19 26.9,118.19 25.38,119.72 25.38,123.02 31.73,129.37 33.25,129.37 34.78,130.89 v38.08,130.89 | v65,135.21 66.05,136.25 M_06.4
  Bottom 0.2: v38.08,130.89 48.65,130.89 52.44,127.1 59.9,127.1 59.92,127.08 65,132.16 v65,135.21
4_SX3  (via drill 0.35)
  Top 0.2: v7.03,71.13 7.03,69.83 JP1.1 | U4.5 32.15,91.12 30.97,89.94 v30.97,89.49
  Bottom 0.2: v7.03,71.13 1.73,76.43 1.73,89.74 1.98,89.49 10.08,89.49 11.1,88.63 12.63,87.1 19.65,87.1 22.04,89.49 v30.97,89.49
5_SX1
  Top 0.2: U1.6 32.2,35.6 27.67,31.07 24.36,31.07 24.11,31.32 24.11,37.17 30.48,43.54 30.48,54.41 28.67,56.22 26.93,56.22 M_04.4
5_SX2  (via drill 0.35)
  Top 0.2: U2.6 30.48,119.17 29.03,117.72 26.81,117.72 24.98,119.55 24.98,123.58 v30.36,128.96 | v30.06,135.21 29.01,136.25 M_08.4
  Bottom 0.2: v30.36,128.96 30.89,129.49 30.89,134.37 v30.06,135.21
5_SX3  (via drill 0.35)
  Top 0.2: v22.08,111.59 19.13,111.59 18.49,112.23 17.63,112.23 16.27,113.58 R28.2 16.27,116.63 v15.98,116.92 | U4.6 33.16,90.72 32.6,90.16 32.6,90.09 30.02,87.51 30,87.51 29.67,87.18 v29.22,87.18 | v8.62,88.73 7.35,90 v7.35,90.17 | v5.31,99.4 5.87,99.95 6.71,99.95 7.68,100.93 9.08,100.93 9.72,101.57 9.72,101.69 9.91,101.87 9.91,104.71 8.87,105.75 v8.36,105.75 | v11.16,112.86 13.95,115.65 v13.95,117.94
  Bottom 0.2: v29.22,87.18 20.29,87.18 19.82,86.7 12.42,86.7 10.56,88.56 10.11,88.94 8.83,88.94 v8.62,88.73 | v7.35,90.17 6.08,91.44 6.08,98.89 5.57,99.4 v5.31,99.4 | v8.36,105.75 7.89,106.22 7.89,106.73 10.03,108.86 10.03,112.49 10.39,112.86 v11.16,112.86 | v13.95,117.94 14.97,117.94 v15.98,116.92
6_SX1
  Top 0.2: R2.2 2.73,22.43 2.73,19.03 SWB_2.3 2.83,18.93 3.83,17.93 5.03,17.93 SWITCH_M2.2 5.13,17.93 5.83,17.93 5.93,18.03 5.93,19.23 7.73,21.03 8.73,21.03 8.83,21.13 8.83,22.43 SWR_2.2 10.48,22.43 12.47,24.43 21.66,24.43 32.34,35.11 32.72,35.11 32.82,35.2 U1.7
6_SX2  (via drill 0.35)
  Top 0.2: SWITCH_M6.2 4.93,97.53 3.83,97.53 2.73,98.63 2.73,98.83 SWB_6.3 2.73,98.93 2.73,101.33 2.78,101.38 | v30.73,118.43 31.03,118.73 33.73,118.73 U2.7 | v18.93,126.14 18.67,126.39 17.76,126.39 17.73,126.43 12.43,126.43 11.13,127.73 3.63,127.73 2.03,126.13 2.03,104.83 2.73,104.13 2.73,102.83 R6.2 2.73,102.73 2.73,101.43 2.78,101.38 | 2.78,101.38 2.83,101.33 8.63,101.33 8.93,101.63 8.93,102.73 SWR_6.2
  Bottom 0.2: v30.73,118.43 28.93,118.43 24.33,123.03 24.33,125.23 23.42,126.14 v18.93,126.14
6_SX3
  Top 0.2: SW1.20 21.11,75.98 19.17,77.92 R15.1 19.17,80.99 19.57,81.39 23.14,81.39 23.19,81.35 23.21,81.35 23.61,81.75 25.38,81.75 25.78,82.15 26.81,82.15 27.21,82.55 29.19,82.55 30.25,83.62 32.1,83.62 32.26,83.77 32.26,86.61 33.82,88.18 U4.7
7_SX1  (via drill 0.35)
  Top 0.2: v32.63,34.43 34.53,34.43 U1.8 | SWR_4.2 9.13,62.83 9.13,63.93 8.83,64.23 4.83,64.23 4.73,64.13 4.73,62.83 R4.2 4.73,62.73 4.73,60.93 2.83,59.03 SWB_4.3 2.73,58.93 3.83,57.83 4.93,57.83 SWITCH_M4.2
  Bottom 0.2: v32.63,34.43 32.13,34.93 31.63,34.93 31.03,35.53 31.03,53.03 19.72,64.33 12.73,64.33 11.33,62.93 11.1,62.8 10.96,62.8 8.84,60.68 8.84,60.44 8.45,60.06 6.85,60.06 5.75,58.96 SWB_4.3
7_SX2  (via drill 0.35)
  Top 0.2: SWR_8.2 8.93,142.63 8.93,141.53 7.73,140.33 7.03,140.33 5.93,139.23 5.93,138.03 5.83,137.93 5.13,137.93 SWITCH_M8.2 5.03,137.93 3.83,137.93 2.83,138.93 SWB_8.3 2.73,139.03 2.63,139.13 2.63,142.63 R8.2 | v32.13,118.03 34.53,118.03 U2.8
  Bottom 0.2: v32.13,118.03 31.03,119.13 29.83,119.13 29.53,118.83 29.13,118.83 24.73,123.23 24.73,139.33 19.63,144.43 8.23,144.43 2.83,139.03 SWB_8.3
7_SX3
  Top 0.2: SW1.19 27.47,76.23 27.47,77.55 25.72,77.55 22.98,80.29 R29.1 23.78,81.35 25.55,81.35 25.95,81.75 26.98,81.75 27.38,82.15 29.35,82.15 30.42,83.22 32.27,83.22 32.66,83.6 32.66,86.19 34.59,88.13 U4.8
8_SX1
  Top 0.2: U1.13 36.59,33.88 40.28,30.19 40.28,25.48 | 40.28,25.48 R1.2 40.37,22.35 40.37,19.89 41.56,18.7 SWB_1.3 41.83,18.63 42.83,17.63 43.93,17.63 SWITCH_M1.2 | SWR_1.2 46.46,22.67 46.46,23.7 45.19,24.97 40.79,24.97 40.28,25.48
8_SX2  (via drill 0.35)
  Top 0.2: U2.13 36.59,115.16 36.84,114.92 36.93,114.93 37.83,114.03 39.53,114.03 v42.03,111.53 | R5.2 41.53,102.83 41.53,103.93 41.83,104.23 48.13,104.23 48.23,104.13 48.23,102.83 SWR_5.2 48.23,102.73 48.23,99.33 47.53,98.63 47.53,97.53 47.43,97.43 45.93,97.43 44.83,98.53 44.83,99.03 44.73,99.13 44.03,99.13 SWITCH_M5.2 43.93,99.13 42.03,99.13 41.73,98.83 SWB_5.3
  Bottom 0.2: v42.03,111.53 41.73,111.23 41.73,98.83 SWB_5.3
8_SX3  (via drill 0.35)
  Top 0.2: SW1.18 30,75.98 26.9,79.08 26.9,80.43 R30.1 27.42,80.55 28.22,81.35 29.94,81.35 29.95,81.36 29.95,81.38 30.99,82.42 38.63,82.42 39.03,82.82 41.74,82.82 v42.06,83.14 | U4.13 36.59,89 36.77,88.82 37.22,88.82 37.74,89.34 39.89,89.34 41.83,87.4 41.83,86.83 41.72,86.72 v41.44,86.44
  Bottom 0.2: v41.44,86.44 41.72,86.16 43.12,84.76 43.12,84.34 42.34,83.56 42.34,83.14 v42.06,83.14
9_SX1  (via drill 0.35)
  Top 0.2: SWR_3.2 47.03,62.73 47.03,61.63 45.93,60.53 45.73,60.53 44.63,59.43 44.63,58.43 44.53,58.33 43.73,58.33 SWITCH_M3.2 43.63,58.33 42.33,58.33 41.53,59.13 SWB_3.3 41.43,59.23 40.43,60.23 40.43,62.73 R3.2 | v37.73,33.93 37.13,33.93 37.03,34.03 37.03,34.43 U1.14
  Bottom 0.2: v37.73,33.93 36.03,35.63 32.73,35.63 32.43,35.33 31.83,35.33 31.43,35.73 31.43,49.13 41.43,59.13 SWB_3.3
9_SX2  (via drill 0.35)
  Top 0.2: R7.2 45.83,142.63 43.23,142.63 SWR_7.2 43.13,142.53 43.13,140.43 41.73,139.03 SWB_7.3 | v37.73,118.03 37.03,118.03 U2.14 | v42.83,130.13 42.43,130.13 40.53,132.03 40.53,137.83 41.63,138.93 SWB_7.3 | SWITCH_M7.2 43.93,138.13 42.53,138.13 41.73,138.93 SWB_7.3
  Bottom 0.2: v37.73,118.03 37.73,125.03 v42.83,130.13
9_SX3  (via drill 0.35)
  Top 0.2: R31.1 30.63,80.52 | 30.63,80.52 30.97,80.18 30.97,77.82 SW1.17 | U4.14 37.19,89.74 40.05,89.74 42.4,87.4 v42.4,86.44 | v43.02,83.28 43.02,82.77 42.67,82.42 39.21,82.42 38.81,82.02 31.62,82.02 30.63,81.02 30.63,80.52
  Bottom 0.2: v42.4,86.44 42.74,86.1 42.74,85.91 43.52,85.12 43.52,83.78 v43.02,83.28
10_SX1
  Top 0.2: U1.15 37.83,35.13 37.83,34.83 38.43,34.23 38.43,32.63 40.73,30.33 40.73,25.63 40.93,25.43 45.33,25.43 46.33,24.43 59.63,24.43 65.83,18.23 66.93,18.23 M_01.6
10_SX2  (via drill 0.35)
  Top 0.2: U2.15 40.11,118.77 40.85,118.03 40.85,117.92 45.55,113.22 45.55,111.64 45.28,111.36 45.28,110.66 v45.15,110.53 | v61.96,104.48 66.98,99.45 M_05.6
  Bottom 0.2: v45.15,110.53 50.95,104.73 61.7,104.73 v61.96,104.48
10_SX3  (via drill 0.35)
  Top 0.2: R32.1 34.82,80.39 | 34.82,80.39 35.35,79.86 SW1.16 | v43.41,86.19 43.41,86.95 40.04,90.32 U4.15 | v43.73,82.38 43.73,82.02 39.37,82.02 38.97,81.62 35.79,81.62 34.82,80.64 34.82,80.39
  Bottom 0.2: v43.41,86.19 43.92,85.68 43.92,82.63 43.7,82.41 v43.73,82.38
11_SX1
  Top 0.2: U1.16 38.37,35.6 38.84,35.13 38.84,32.78 41.13,30.49 41.13,26.24 41.54,25.83 45.49,25.83 46.49,24.83 59.79,24.83 61.17,23.45 61.19,23.45 64.24,20.4 64.24,20.38 65.74,18.88 68.01,18.88 68.01,18.81 68.56,18.26 68.56,17.61 68.19,17.24 M_01.5
11_SX2  (via drill 0.35)
  Top 0.2: U2.16 40.4,119.17 41.25,118.33 41.25,118.08 45.95,113.38 v45.95,111.08 | v62.97,104.48 68.01,99.44 68.01,98.72 68.06,98.67 68.06,97.63 67.68,97.25 M_05.5
  Bottom 0.2: v62.97,104.48 62.91,104.48 62.24,105.15 61.67,105.15 61.65,105.13 51.12,105.13 45.95,110.29 v45.95,111.08
11_SX3  (via drill 0.35)
  Top 0.2: v45.19,82.12 44.68,81.62 39.54,81.62 38.73,80.8 R33.1 38.73,76.82 SW1.15 | v44.43,86.19 44.43,86.44 44.37,86.5 44.37,86.7 40.35,90.72 U4.16
  Bottom 0.2: v44.43,86.19 44.43,82.89 v45.19,82.12
12_SX1  (via drill 0.35)  (1 unrouted)
  Top 0.2: M_01.4 66.58,16.64 66.09,16.64 v64.81,17.92 | U1.19 43.45,36.8 43.49,36.84 43.49,38.35 44.04,38.91 44.61,38.91 45,38.51 45,38.37 | 58.15,25.23 59.96,25.23 61.33,23.85 61.36,23.85 64.3,20.91 v64.75,20.91
  Bottom 0.2: v64.75,20.91 64.75,17.97 v64.81,17.92
12_SX2  (via drill 0.35)
  Top 0.2: M_05.4 66.12,96.25 65.51,96.86 65.51,100.35 62.41,103.46 v61.45,103.46 | v44.35,109.98 44.35,111 45.15,111.8 45.15,113.05 43.57,114.64 v43.16,114.64 | v44.68,121.24 42.74,121.24 42.67,121.31 41.42,121.31 41.25,121.13 41.25,120.74 40.87,120.37 U2.19
  Bottom 0.2: v43.16,114.64 44.68,116.16 v44.68,121.24 | v61.45,103.46 61.19,103.46 60.32,104.33 50.79,104.33 45.56,109.56 44.77,109.56 v44.35,109.98
12_SX3  (via drill 0.35)
  Top 0.2: SW1.14 40.43,76.85 42.79,79.21 42.79,80.35 | 42.79,80.35 R34.1 | U4.19 39.5,91.92 v39.86,92.28 | v43.92,80.6 43.67,80.35 42.79,80.35
  Bottom 0.2: v39.86,92.28 45.11,87.03 45.11,85.91 44.94,85.74 44.94,83.34 45.87,82.4 45.87,81.84 45.47,81.45 44.77,81.45 v43.92,80.6
13_SX1  (via drill 0.35)
  Top 0.2: U1.20 39.13,37.2 39.43,37.5 39.43,40.98 44.98,46.53 59.79,46.53 60.26,46.99 60.86,46.99 v61.45,47.58 | M_03.6 66.58,57.84 65.68,57.84 65.13,57.29 65.13,53.04 64.45,52.36 v64.45,52.2
  Bottom 0.2: v64.45,52.2 64.45,51.85 62.46,49.86 62.11,49.44 61.98,49.33 61.45,48.8 v61.45,47.58
13_SX2  (via drill 0.35)
  Top 0.2: U2.20 40.62,120.77 40.85,121 40.85,121.3 41.26,121.71 42.84,121.71 42.91,121.64 44.12,121.64 44.4,121.92 44.41,121.92 v44.68,122.2 | v46.72,113.61 v46.72,111.84 | v49.79,107.75 49.74,107.69 v45.19,107.69 | v45.45,106.25 44.68,106.25 44.32,106.62 32.75,106.62 31.63,105.49 31.63,105.26 v31.9,104.98 | M_07.6 27.93,99.27 27.93,100.27 28.68,101.03 v28.68,101.43 | v30.21,103.71 v30.21,101.43
  Bottom 0.2: v44.68,122.2 44.96,121.92 46.1,120.78 46.1,119.95 45.53,119.37 45.53,114.8 v46.72,113.61 | v46.72,111.84 46.72,110.83 v49.79,107.75 | v45.19,107.69 45.19,106.51 v45.45,106.25 | v31.9,104.98 30.63,103.71 v30.21,103.71 | v30.21,101.43 v28.68,101.43
13_SX3  (via drill 0.35)
  Top 0.2: SW1.13 42.97,76.99 43.78,77.81 45.19,77.81 46.85,79.47 R35.1 46.55,80.86 v46.55,82.38 | U4.20 38.69,92.32 v39.6,93.24
  Bottom 0.2: v39.6,93.24 41.11,93.24 41.24,93.37 42.15,93.37 42.8,92.72 42.8,89.91 45.51,87.2 45.51,85.74 45.34,85.57 45.34,83.5 46.46,82.38 v46.55,82.38
14_SX1
  Top 0.2: U1.21 37.83,37.63 38.93,37.63 39.03,37.73 39.03,41.23 44.73,46.93 59.63,46.93 60.96,48.26 61.62,48.26 65.53,52.17 65.53,57.13 65.63,57.23 66.93,57.23 M_03.5
14_SX2  (via drill 0.35)
  Top 0.2: v38.83,122.24 38.08,122.24 37.77,121.93 U2.21 | v41.33,113.23 v38.83,115.73 | M_07.5 27.04,97.38 v28.83,97.38
  Bottom 0.2: v38.83,115.73 v38.83,122.24 | v41.33,113.23 41.33,103.63 31.43,93.73 29.83,93.73 28.83,94.72 v28.83,97.38
14_SX3  (via drill 0.35)
  Top 0.2: SW1.12 47.08,77.55 48.49,77.55 50.66,79.72 R36.1 50.66,80.97 50.27,81.36 48.75,81.36 48.24,81.87 48.24,81.9 v47.5,82.63 | U4.21 38.33,92.72 38.93,93.31 38.93,93.52 39.32,93.92 39.33,93.92 v39.6,94.2
  Bottom 0.2: v39.6,94.2 39.88,93.92 42.17,93.92 43.2,92.89 43.2,90.08 45.91,87.36 45.91,85.58 45.74,85.41 45.74,83.67 46.35,83.06 46.83,83.06 47.25,82.63 v47.5,82.63
15_SX1
  Top 0.2: M_03.4 67.03,56.23 68.33,56.23 68.43,56.33 68.43,58.33 62.53,64.23 52.39,64.23 47.33,59.17 47.33,50.09 38.63,41.39 38.63,38.69 38.31,38.38 U1.22
15_SX2  (via drill 0.35)
  Top 0.2: U2.22 38.25,123.2 38.44,123.2 38.48,123.16 v39.93,123.16 | v39.93,115.63 40.69,115.63 43.49,112.83 43.49,109.45 42.37,108.33 v39.83,108.33 | v32.23,102.53 31.47,101.77 31.47,99.68 31.93,99.23 31.93,97.87 v31.73,97.67 | v29.53,96.17 26.98,96.17 M_07.4
  Bottom 0.2: v39.93,115.63 v39.93,123.16 | v39.83,108.33 38.03,108.33 v32.23,102.53 | v31.73,97.67 30.23,96.17 v29.53,96.17
15_SX3  (via drill 0.35)
  Top 0.2: SW1.11 50.33,75.98 50.38,76.03 50.53,76.03 54.47,79.98 R37.1 54.47,81.48 54.08,81.87 48.83,81.87 48.24,82.46 48.24,83.25 v48.17,83.32 | U4.22 37.63,93.5 38,93.12 38.08,93.12 38.53,93.57 38.53,93.69 38.93,94.09 38.93,94.48 39.32,94.87 39.33,94.87 v39.6,95.15
  Bottom 0.2: v39.6,95.15 39.88,94.87 40.44,94.32 42.33,94.32 43.67,92.98 43.67,90.17 46.31,87.53 46.31,85.27 46.21,85.17 46.21,83.76 46.52,83.46 46.99,83.46 47.06,83.39 48.09,83.39 v48.17,83.32
!INT_SX3
  Top 0.2: U4.9 34.99,86.95 33.58,85.54 R24.1
!RESET_SX1
  Top 0.2: R9.1 37.93,42.74 36.09,42.74 35.43,42.08 35.43,41.51 36.59,40.35 U1.23
!RESET_SX2
  Top 0.2: U2.23 36.59,125.28 37.12,125.81 39.77,125.81 R16.1
!RESET_SX3
  Top 0.2: U4.23 36.59,96.74 36.01,97.32 36.01,98.34 36.56,98.89 37.83,98.89 38.84,99.9 R14.1
ADDR0_SX1
  Top 0.2: U1.26 35.39,39.85 32.75,42.5 32.77,42.52 JP8.1
ADDR0_SX2
  Top 0.2: JP7.1 33.33,125.89 35.39,123.82 U2.26
ADDR0_SX3
  Top 0.2: U4.26 35.39,96.24 32.75,98.89 32.75,100.56 JP11.1
ADDR1_SX1
  Top 0.2: U1.10 35.39,30.71 36.81,29.29 36.78,29.27 JP9.1
ADDR1_SX2
  Top 0.2: 35.16,111.99 35.16,112.17 35.19,112.19 | 35.19,112.19 35.39,112.4 U2.10 | JP6.1 35.39,111.99 35.19,112.19
ADDR1_SX3
  Top 0.2: U4.10 35.39,85.44 JP10.1
CAN_RX2
  Top 0.2: JP3.4 14.31,123.53 11.42,123.53 8.83,120.93 7.73,120.93 6.53,119.73 5.83,119.73 J1.4
CAN_TX2
  Top 0.2: JP3.3 17.02,124.29 15.66,122.93 11.63,122.93 8.43,119.73 J1.3
GND_MCU  (via drill 0.35)  (66 unrouted)
  Top 0.2: R1.1 SWR_1.1 44.83,22.53 v44.83,23.83 | R2.1 SWR_2.1 6.93,22.53 6.93,23.83 7.03,23.93 8.33,23.93 9.23,24.83 16.83,24.83 v17.13,25.13 | JP9.2 36.81,27.46 36.81,26.5 v37.06,26.24 | JP7.2 33.33,128.53 33,128.86 27.9,123.76 C7.2 28.19,120.37 29.07,120.37 U2.3 35.39,120.37 U2.29 36.3,119.46 36.56,119.46 36.66,119.57 U2.17 40.57,119.57 41.38,118.76 C8.2 | R3.1 43.53,62.77 | 43.53,62.77 SWR_3.1 | POWE_3.3.2 23.35,115.14 | 23.35,115.14 23.35,118.7 STATUS_LED.2 | R22.1 2.86,66.8 | 2.86,66.8 2.86,62.84 R4.1 | SW1.10 SW1.9 | SW1.9 SW1.8 SW1.7 SW1.6 SW1.5 SW1.4 SW1.3 SW1.2 SW1.1 23.93,66.12 3.54,66.12 2.86,66.8 | C1.2 27.56,36.8 U1.3 35.39,36.8 U1.29 36.19,36 U1.17 43.66,36 C4.2 | M_09.1 23.2,114.99 23.35,115.14 | C9.2 28.63,88.79 31.76,91.92 U4.3 35.39,91.92 U4.29 36.19,91.12 U4.17 40.51,91.12 45.56,86.07 C3.2 49.23,86.13 49.21,86.17 | v38.84,25.74 38.79,25.79 C2.2 | 43.53,62.77 v43.53,62.73 43.53,62.83 44.63,63.93 v48.43,63.93 | v49.83,64.13 49.83,74.33 55.33,79.83 55.33,81.23 52.83,83.73 48.73,83.73 48.43,84.03 39.53,84.03 39.53,84.43 39.73,84.63 39.93,84.63 39.93,84.43 39.63,84.43 39.53,84.53 39.52,84.62 | 55.63,27.13 v55.63,26.73 | 44.33,36.03 44.33,35.43 C4.2 | v44.33,34.03 44.33,35.33 C4.2 | v28.83,13.33 28.83,13.23 26.93,13.23 M_02.1 | v37.83,3.83 38.13,4.13 57.63,4.13 65.13,11.63 65.13,12.73 65.63,13.23 66.93,13.23 M_01.1 | v48.23,72.83 v45.83,72.83 | v41.33,83.83 40.43,83.83 40.43,83.43 40.33,83.33 39.53,83.33 39.53,83.53 40.33,83.53 40.33,83.63 40.13,83.63 | 40.13,83.63 C6.2 | 40.13,83.63 40.14,83.69 | v62.13,79.93 58.73,76.53 58.73,72.93 49.83,64.03 49.53,64.33 49.53,69.03 45.13,73.43 v45.13,73.53
  Top 0.2: v45.13,69.23 45.13,67.43 SW1.9 | v69.63,133.23 69.73,133.13 70.73,134.13 70.73,140.03 64.03,146.73 4.83,146.73 1.63,143.53 1.63,128.63 v2.13,128.13 | v2.93,116.69 2.93,104.53 4.63,102.83 R6.1
  Top 0.203: 28.19,120.37 C7.2
  Bottom 0.2: v37.06,26.24 38.33,26.24 v38.84,25.74 | v48.43,63.93 49.63,63.93 v49.83,64.13 | v44.83,23.83 46.83,25.83 46.83,31.53 v44.33,34.03 44.33,33.93 38.73,33.93 38.68,33.88 | 38.68,33.88 35.53,30.73 34.33,30.73 28.33,24.73 28.33,24.53 | 28.33,24.53 17.73,24.53 v17.13,25.13 | 28.33,24.53 28.83,24.53 v28.83,13.33 28.83,12.57 37.57,3.83 v37.83,3.83 | 38.68,33.88 38.43,34.13 38.43,34.23 38.03,34.63 37.63,34.63 31.83,40.43 31.83,48.93 40.73,57.83 42.73,57.83 43.83,58.93 43.83,59.83 44.23,60.23 44.23,60.63 44.53,60.93 44.93,60.93 46.13,62.13 46.13,72.53 v45.83,72.83 | v48.23,72.83 48.63,72.83 52.23,76.43 52.23,84.23 51.33,85.13 50.73,85.13 48.93,83.33 48.93,83.03 47.53,81.63 46.23,81.63 45.63,81.03 44.93,81.03 44.63,80.73 44.63,80.33 44.13,79.83 43.73,79.83 41.33,82.23 v41.33,83.83 | v45.13,69.23 v45.13,73.53 | v2.13,128.13 2.13,117.49 v2.93,116.69
  other vias: 47.22,87.46 55.1,116.16 7.35,129.62 14.46,110.32 30.97,122.51 66.78,30.56 66.27,75.77 29.19,110.06 58.15,106.51 69.07,145.88 11.66,108.29 67.29,103.46 26.14,129.11 50.02,144.35 59.42,110.83 42.65,110.32 41.13,116.16 29.44,40.47 42.14,46.82 48.49,48.34 34.52,95.59 42.4,124.54 43.92,135.46 21.57,76.79 5.06,86.7 38.33,87.71 11.16,125.3 24.36,102.44 22.84,22.69 7.85,8.72 7.6,48.6 31.48,95.84 33.51,132.67 27.16,123.02 26.14,119.97 6.33,107.02 3.79,104.98 28.94,90.51
  pour Top: -12.01,152.89 83.47,152.89 83.47,-12.72 -12.01,-12.72
  pour Bottom: -11.48,157.69 83.24,157.69 83.24,-9.93 -11.48,-9.93
INT_01  (via drill 0.35)
  Top 0.2: U1.9 34.99,29.14 R12.1 34.63,28.83 v34.63,30.03 | 19.08,106.88 18.73,106.53 18.53,106.53 17.43,105.43 11.23,105.43 10.23,106.43 10.23,110.03 9.83,110.43 9.83,112.43 8.93,113.33 7.83,113.33 7.63,113.53 6.53,113.53 6.33,113.33 5.23,113.33 4.33,114.23 4.33,115.52 5.8,116.99 J1.6 5.05,117.89 3.58,117.89 2.43,119.04 2.43,125.93 3.83,127.33 7.36,127.33 8.11,126.47 JP2.1 | 19.08,106.88 19.23,107.03 19.23,108.13 M_09.5 | v19.23,106.83 19.13,106.83 19.08,106.88
  Bottom 0.2: v34.63,30.03 34.63,27.46 44.5,17.58 46.78,17.58 47.63,18.43 47.63,35.53 45.03,38.13 45.03,50.16 47.07,52.21 47.07,53.12 46.42,53.76 46.38,53.76 46.21,53.93 46.21,54.94 46.33,55.06 46.33,57.96 47.07,58.71 47.07,59.62 46.97,59.72 46.97,61.21 47.33,61.56 47.33,75.63 26.63,96.33 26.63,103.93 26.13,104.43 25.73,104.43 25.23,104.93 21.53,104.93 19.63,106.83 v19.23,106.83
INT_02
  Top 0.2: U2.9 34.99,117.18 | 34.99,117.18 34.99,112.82 33.9,111.73 R19.1 | 8.93,116.93 8.73,117.13 8.43,117.13 J1.5 | 8.93,116.93 9.83,116.03 9.83,113.03 10.23,112.63 10.23,110.63 10.63,110.23 10.63,106.63 11.43,105.83 17.23,105.83 18.23,106.83 18.23,108.13 M_09.6 | JP2.2 3.54,125.63 3.06,125.15 3.06,119.07 3.7,118.43 6.33,118.43 7.53,117.23 8.33,117.23 J1.5 | 8.93,116.93 J1.5 | 34.99,117.18 34.9,117.27 34.37,117.27 34.01,117.63 32.94,117.63 32.67,117.35 31.56,117.35 31.16,117.75 30.44,117.75 30.26,117.94 29.95,117.94 29.24,117.23 26.73,117.23 24.53,119.43 24.53,119.93 22.94,121.51 19.41,121.51 18.41,122.51 11.77,122.51 9.58,120.31 9.58,119.17 8.34,117.93 J1.5
N$5
  Top 0.2: R21.1 37.28,110.1 36.4,110.98 JP6.2
N$8
  Top 0.2: JP8.2 32.77,45.27 32.48,45.56 R13.1
N$13
  Top 0.2: R28.1 18.03,115.13 18.73,115.13 18.83,115.23 18.83,116.43 19.83,117.43 20.13,117.43 20.23,117.53 20.23,118.83 STATUS_LED.1
N$14
  Top 0.2: JP10.2 36.58,84.13 36.92,83.79 R25.1
N$15
  Top 0.2: JP11.2 33.27,102.15 R26.1
N$193
  Top 0.2: R27.1 18.03,118.93 18.93,118.93 19.03,119.03 19.03,120.33 19.13,120.43 21.33,120.43 21.43,120.33 21.43,117.43 20.53,116.53 20.13,116.53 20.03,116.43 20.03,115.13 POWE_3.3.1
NEOPIXEL_01  (via drill 0.35)
  Top 0.2: v69.19,15.23 67.03,15.23 M_01.3 | v69.93,84.93 70.23,85.23 70.23,90.23 v69.73,90.73 | v69.73,113.83 70.23,114.33 70.23,121.13 67.63,123.73 64.83,123.73 63.73,122.63 63.73,122.23 J2.2
  Bottom 0.2: v69.19,15.23 70.83,16.87 70.83,52.34 68.49,54.67 68.49,55.93 68.53,55.93 70.43,57.83 70.43,84.43 v69.93,84.93 | v69.73,90.73 69.73,91.16 70.03,91.46 70.03,113.53 v69.73,113.83
NEOPIXEL_02  (via drill 0.35)
  Top 0.2: v57.93,6.43 57.93,6.03 57.13,5.23 42.93,5.23 32.93,15.23 26.93,15.23 M_02.3 | v69.03,114.53 69.83,115.33 69.83,120.93 68.53,122.23 J2.1
  Bottom 0.2: v57.93,6.43 59.28,6.43 68.78,15.93 69.29,15.93 70.43,17.07 70.43,52.14 68.09,54.47 68.09,55.67 58.93,64.83 48.13,64.83 47.73,65.23 47.73,71.33 54.93,78.53 61.93,78.53 70.03,86.63 70.03,89.43 69.03,90.43 69.03,91.03 69.63,91.63 69.63,112.97 69.05,113.55 69.05,114.51 v69.03,114.53
NEOPIXEL_03  (via drill 0.35)
  Top 0.2: v69.7,55.99 68.93,55.23 67,55.23 M_03.3 | v67.83,117.33 66.73,118.43 65.73,118.43 64.53,119.63 63.73,119.63 J2.4
  Bottom 0.2: v69.7,55.99 70.2,55.99 70.83,56.61 70.83,116.36 69.86,117.33 v67.83,117.33
NEOPIXEL_04  (via drill 0.35)
  Top 0.2: v48.43,65.53 32.13,65.53 25.43,58.83 25.43,55.53 25.73,55.23 26.83,55.23 M_04.3 | v68.53,115.63 68.53,117.73 66.63,119.63 66.23,119.63 J2.3
  Bottom 0.2: v48.43,65.53 48.13,65.83 48.13,71.13 50.23,73.23 57.23,73.23 70.43,86.43 70.43,114.13 68.93,115.63 v68.53,115.63
NEOPIXEL_05
  Top 0.2: M_05.3 66.93,95.23 65.83,95.23 65.63,95.43 65.63,96.13 65.03,96.73 65.03,100.23 62.53,102.73 61.13,102.73 60.73,103.13 60.73,104.73 64.93,108.93 64.93,110.13 64.23,110.83 63.13,110.83 62.23,111.73 62.23,116.03 63.33,117.13 63.63,117.13 J2.6
NEOPIXEL_06  (via drill 0.35)
  Top 0.2: v69.95,135.23 67.03,135.23 M_06.3
  Bottom 0.2: v69.95,135.23 70.83,134.35 70.83,119.29 69.7,118.16 67.24,118.16 J2.5
NEOPIXEL_07  (via drill 0.35)
  Top 0.2: v29.98,97.68 29.98,97.43 30.28,97.13 30.28,95.67 29.84,95.23 26.93,95.23 M_07.3 | v50.33,106.93 50.24,107.02 32.49,107.02 30.97,105.5 30.97,99.18 v31.23,98.93
  Bottom 0.2: v31.23,98.93 v29.98,97.68 | v50.33,106.93 50.33,106.53 51.27,105.58 61.48,105.58 61.53,105.63 61.73,105.63 64.83,108.73 64.83,108.83 64.93,108.93 64.93,110.03 65.13,110.23 65.13,111.33 64.93,111.53 64.93,112.63 63.73,113.83 63.73,114.53 J2.8
NEOPIXEL_08  (via drill 0.35)
  Top 0.2: M_08.3 29.1,135.25 v29.1,135.03
  Bottom 0.2: 29.41,136.21 | 29.41,136.21 41.83,148.63 55.43,148.63 70.43,133.63 70.43,119.49 69.57,118.63 66.93,118.63 66.73,118.43 65.73,118.43 64.93,117.63 64.93,116.63 66.23,115.33 J2.7 | 29.41,136.21 v29.1,135.03
RESET  (via drill 0.35)
  Top 0.2: JP1.3 9.13,69.73 JP1.2 8.08,71.63 S2.4 5.72,73.34 5.31,73.74 5.31,75.77 4.2,76.88 R22.2 4.9,78.93 S2.3 6.43,79.03 7.43,80.03 13.43,80.03 24.33,90.93 v24.73,90.93 | v6.73,115.83 5.83,114.93 5.83,114.63 J1.8 | v3.63,115.23 3.37,114.97 3.37,107.4 6.34,104.43 v8.63,104.43
  Bottom 0.2: v6.73,115.83 4.23,115.83 v3.63,115.23 | v8.63,104.43 18.23,104.43 18.63,104.03 20.03,104.03 24.73,99.33 v24.73,90.93
SCL_00  (via drill 0.35)
  Top 0.2: R23.1 34.85,98.93 | 34.85,98.93 34.85,97.34 35.79,96.41 U4.25 | U2.25 35.79,123.99 35.75,124.04 R18.1 | U1.25 35.79,40.02 34.58,41.23 R11.1 34.63,43.63 34.63,44.23 35.53,44.23 35.63,44.33 v35.63,44.43 | v18.13,111.03 18.53,111.03 20.23,109.33 20.23,108.23 M_09.4 | 35.73,126.83 R18.1 | J1.2 5.83,122.23 5.83,123.39 6.42,123.98 12.99,123.98 15.04,126.03 17.53,126.03 18.83,124.73 18.83,122.66 19.57,121.91 22.71,121.91 29.63,128.83 29.63,129.23 30.23,129.83 33.13,129.83 34.92,131.62 38.33,131.62 38.82,131.14 38.82,130.61 37.57,129.37 35.19,129.37 34.95,129.12 34.95,127.55 R18.1 | v27.33,102.23 v25.93,100.83 | v33.73,98.93 34.85,98.93
  Bottom 0.2: J1.2 6.53,122.23 7.83,120.93 8.93,120.93 9.03,120.83 9.43,120.83 18.43,111.83 18.43,111.33 v18.13,111.03 18.13,108.93 21.73,105.33 25.43,105.33 25.93,104.83 26.33,104.83 27.03,104.13 27.03,102.53 v27.33,102.23 27.33,102.33 27.7,102.7 29.25,102.7 29.42,102.53 30.56,102.53 33.51,99.58 33.51,99.15 v33.73,98.93 | v35.63,44.43 36.73,44.43 37.43,45.13 37.83,45.13 43.83,51.13 43.83,54.33 45.13,55.63 45.13,56.83 44.23,57.73 44.23,59.63 44.63,60.03 44.63,60.43 44.73,60.53 45.13,60.53 46.53,61.93 46.53,75.23 29.33,92.43 28.53,92.43 28.13,92.83 28.13,94.23 26.23,96.13 26.23,100.53 v25.93,100.83
SDA_00  (via drill 0.35)
  Top 0.2: U4.24 36.19,96.57 35.6,97.17 35.6,98.91 v35.82,99.13 | v35.82,99.13 R20.1 | U2.24 36.19,125.45 37.49,126.75 R17.1 38.35,126.75 39.4,127.79 39.4,129.12 40.11,129.84 40.11,130.41 38.5,132.02 34.64,132.02 32.84,130.23 30.06,130.23 29.23,129.39 29.23,128.99 23.05,122.82 21.85,122.82 v21.57,123.1 | U1.24 36.19,40.18 35.03,41.34 35.03,42.25 36.38,43.59 R10.1 36.73,43.63 36.73,44.23 37.63,44.23 37.73,44.33 v37.73,44.43 | v21.23,106.83 21.23,108.13 M_09.3 | v30.13,94.43 v28.83,93.13 | v35.83,99.13 v35.82,99.13
  Bottom 0.2: 20.83,106.83 v21.23,106.83 | 20.83,106.83 18.53,109.13 18.53,110.43 18.83,110.73 18.83,112.03 10.12,120.73 | 10.12,120.73 8.63,122.23 J1.1 | v37.73,44.43 44.23,50.93 44.23,54.13 45.53,55.43 45.53,57.03 44.63,57.93 44.63,59.43 46.93,61.73 46.93,75.43 29.23,93.13 v28.83,93.13 | v30.13,94.43 31.33,94.43 35.28,98.38 | 20.83,106.83 21.93,105.73 25.63,105.73 26.13,105.23 26.49,105.23 27.43,104.29 27.43,103.46 27.79,103.1 29.42,103.1 29.59,102.93 30.72,102.93 35.28,98.38 | v21.57,123.1 21.57,121.49 20.81,120.73 10.12,120.73 | 35.81,99.14 v35.83,99.13 35.83,98.93 35.28,98.38
VCC_5V  (2 unrouted)
  Top 0.4: M_06.2 64.99,134.25 64.83,134.23 64.63,134.03 64.57,133.84 64.57,131.91 60.72,128.06 | 70.77,15.25 69.76,14.24 M_01.2 64.89,14.24 64.59,13.94 64.59,11.93 57.38,4.72 57.38,4.65 24.53,4.65 | M_03.2 69.31,54.24 70.77,55.71 70.77,95.59 | M_05.2 69.44,94.25 70.77,95.59 | 70.77,95.59 70.77,125.74 68.45,128.06 60.72,128.06 | 60.72,128.06 60.47,128.06 55.33,122.92 55.33,120.59 S1.4 53.68,120.34 53.02,119.67 51.64,119.67 50.97,120.34 S1.8 42.65,127.26 42.65,129.11 39.1,132.67 35.29,132.67 33.7,134.25 M_08.2 26.22,134.25 23.98,132.02 23.98,131.32 21.17,128.5 | 19.14,6.43 19.03,6.43 | 19.03,6.43 5.46,6.43 1.5,10.39 | M_04.2 26.84,54.18 25.13,54.18 24.63,53.69 24.63,51.97 | M_07.2 25.06,94.25 24.56,93.75 24.56,91.89 13.26,80.6 2.27,80.6 1.5,81.36 1.5,91.83 1.48,91.86 1.48,126.3 3.43,128.24 11.41,128.24 12.65,127 19.67,127 21.17,128.5 | JP3.1 21.17,125.81 21.17,128.5 | M_02.2 25.31,14.24 24.49,13.42 24.49,11.78 24.53,11.63 24.53,4.65 | 19.03,6.43 20.81,4.65 24.53,4.65
VCC_5V_IN
  Top 0.4: S1.7 49.15,118.34 | 49.15,118.34 49,118.19 49.43,118.19 S1.7 | J1.12 10.85,104.48 29.19,104.48 32.24,107.52 43.67,107.52 47.73,111.59 47.73,117.94 48.13,118.34 49.15,118.34 | J2.12 58.43,109.53 56.88,111.08 56.88,116.92 55.61,118.19 55.22,118.19 S1.3 54.93,118.33 49.73,118.33 S1.7

## Text on the board
tPlace: gnd | gnd | 0 | 0 | 1 | 1 | PIXELS | I2C | ON | 5V | GND | GND | 6 | 2 | 2 | 3 | 3 | 4 | 4 | 5 | 5 | gnd | gnd | 6 | 6 | 7 | 7